# Altium PCB PCB1.PcbDoc
Units mil, origin at the board's own origin, x right, y up, seen from the top; angles counter-clockwise.
Board outline 1294.43 x 885.83 mil, 4 copper layers (Top Layer, GND, Sign, Bottom Layer), stack 68.548 mil thick; 63 components, 56 nets, 292 pads, 222 vias.
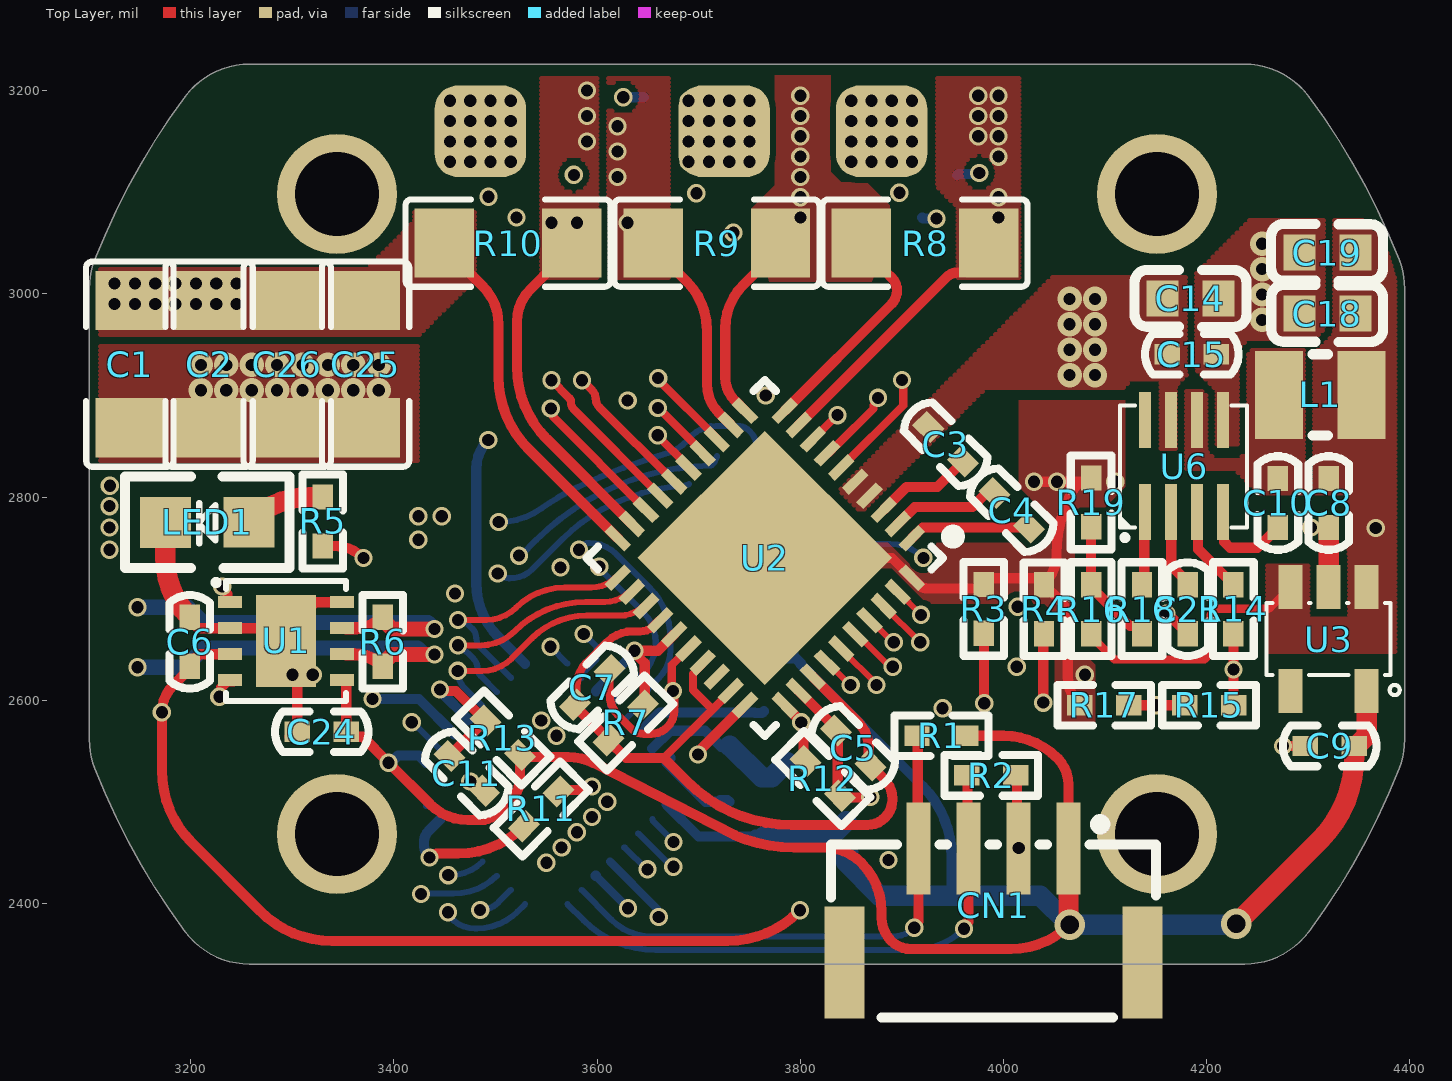
[diagram p0: Top Layer view]
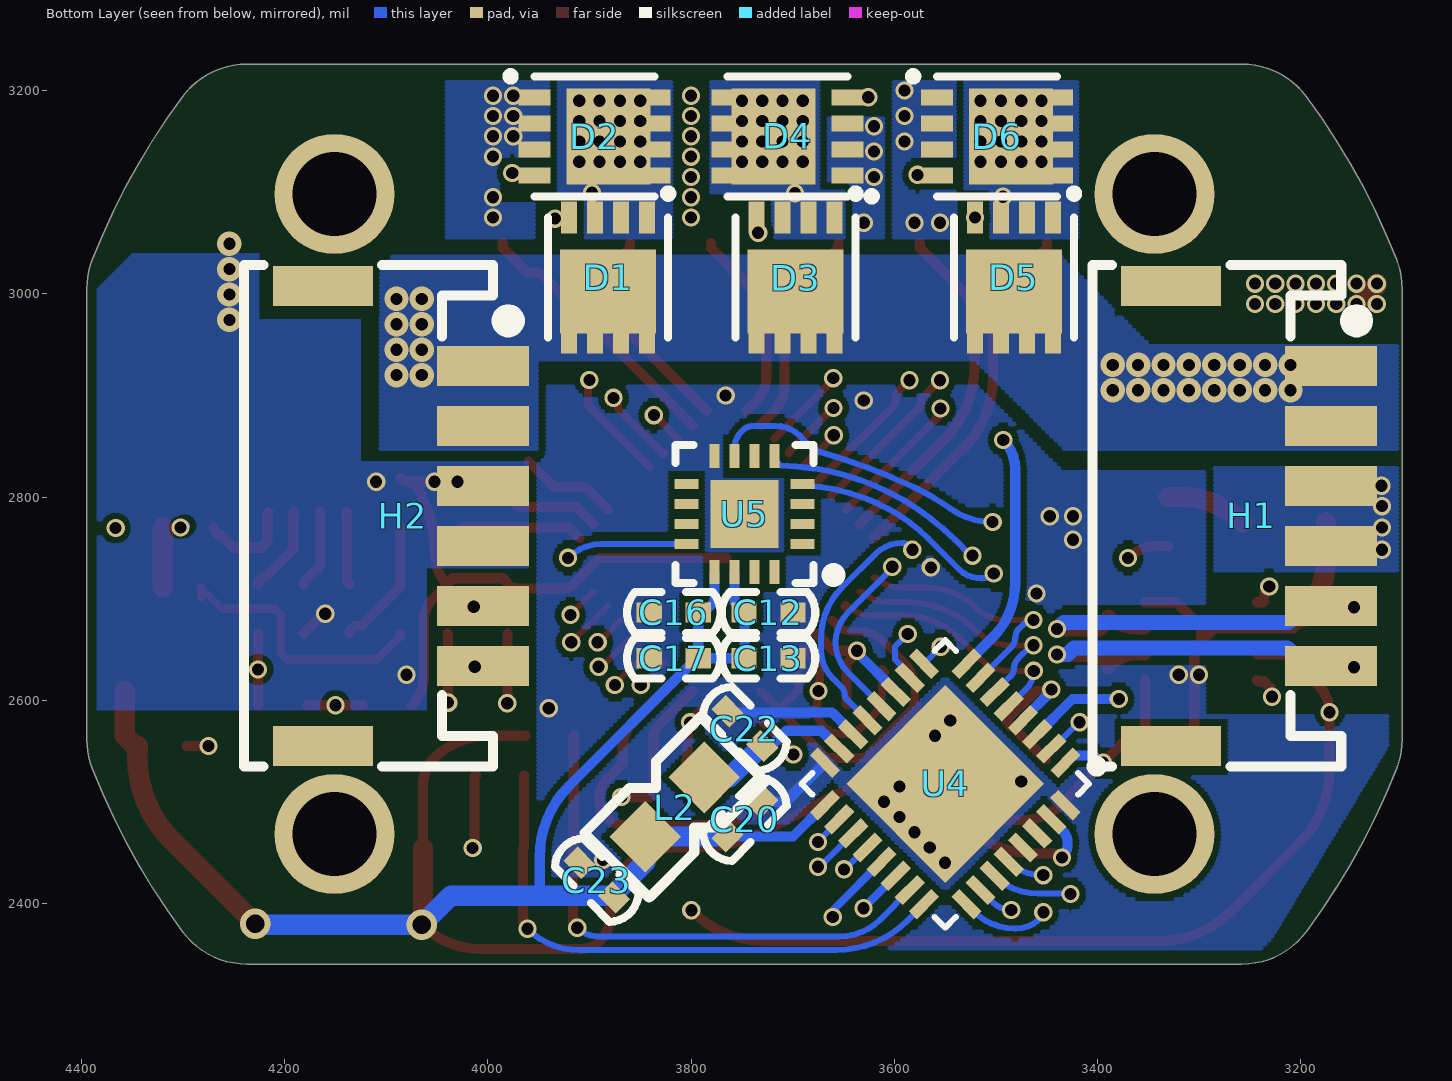
[diagram p1: Bottom Layer view, seen from below]
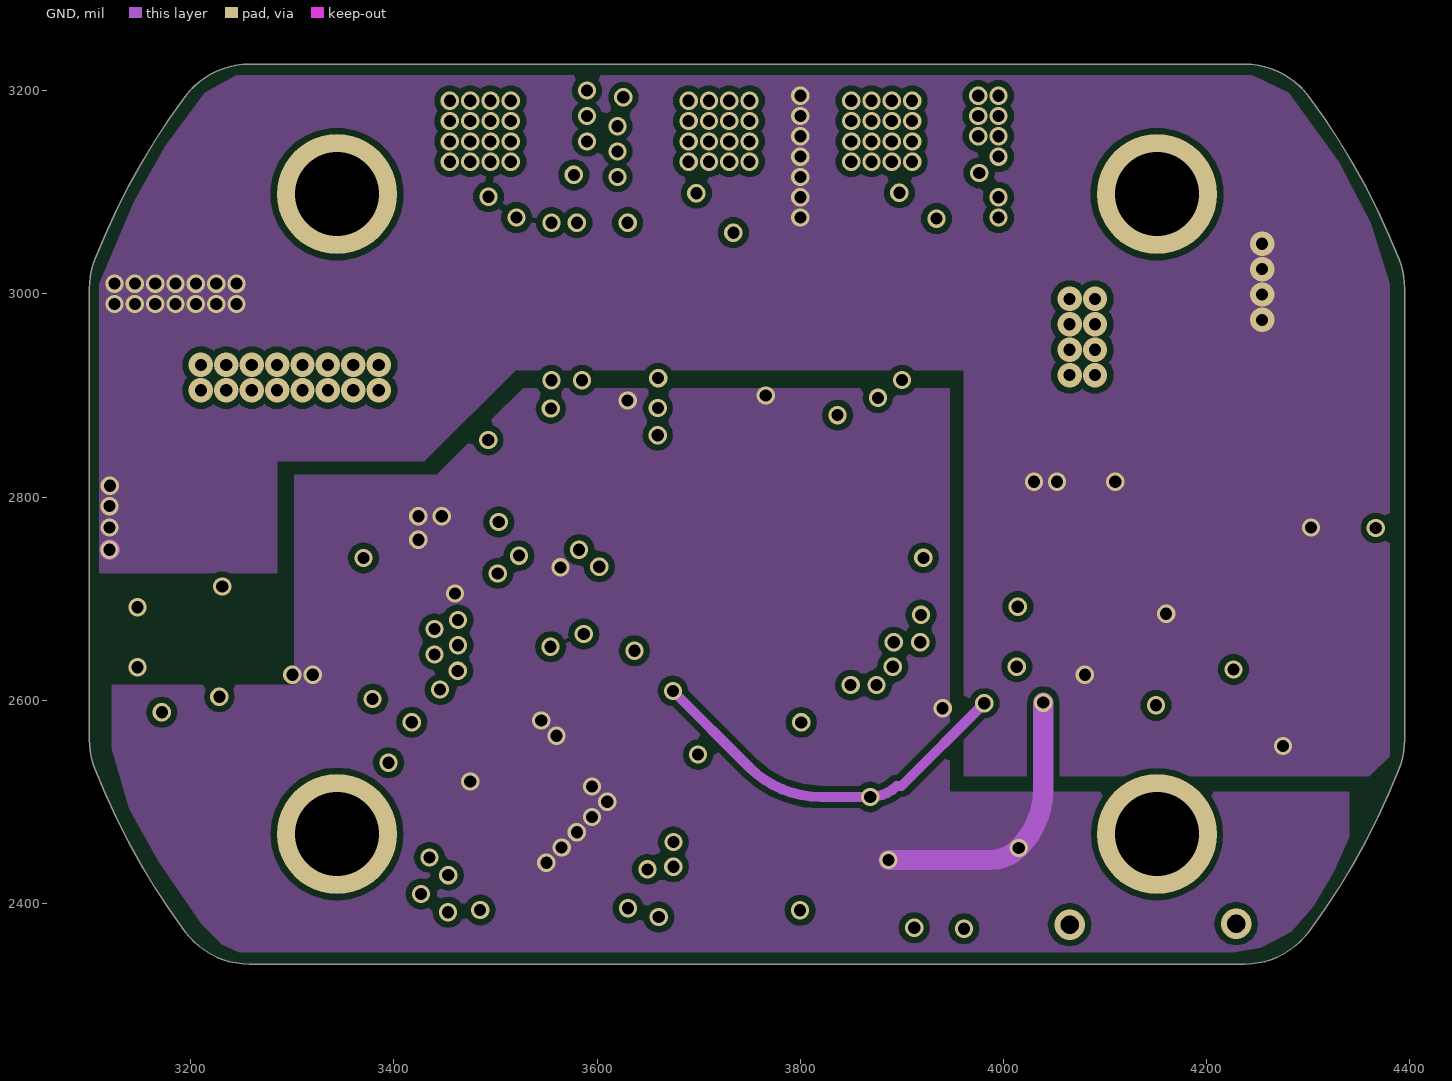
[diagram p2: GND]
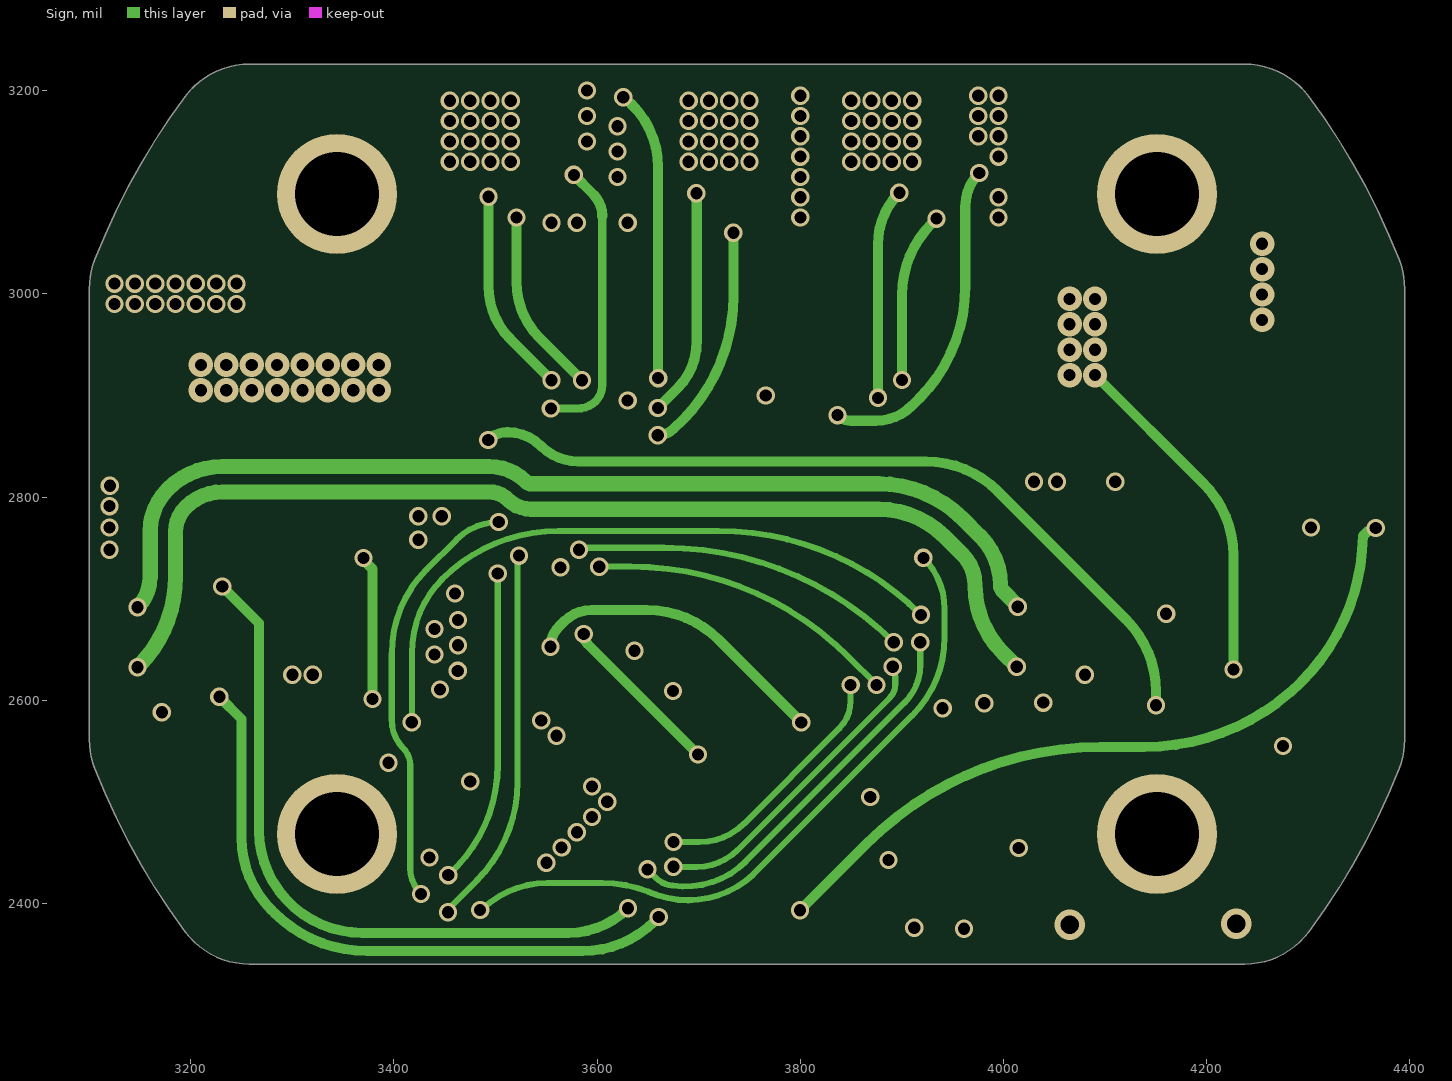
[diagram p3: Sign]
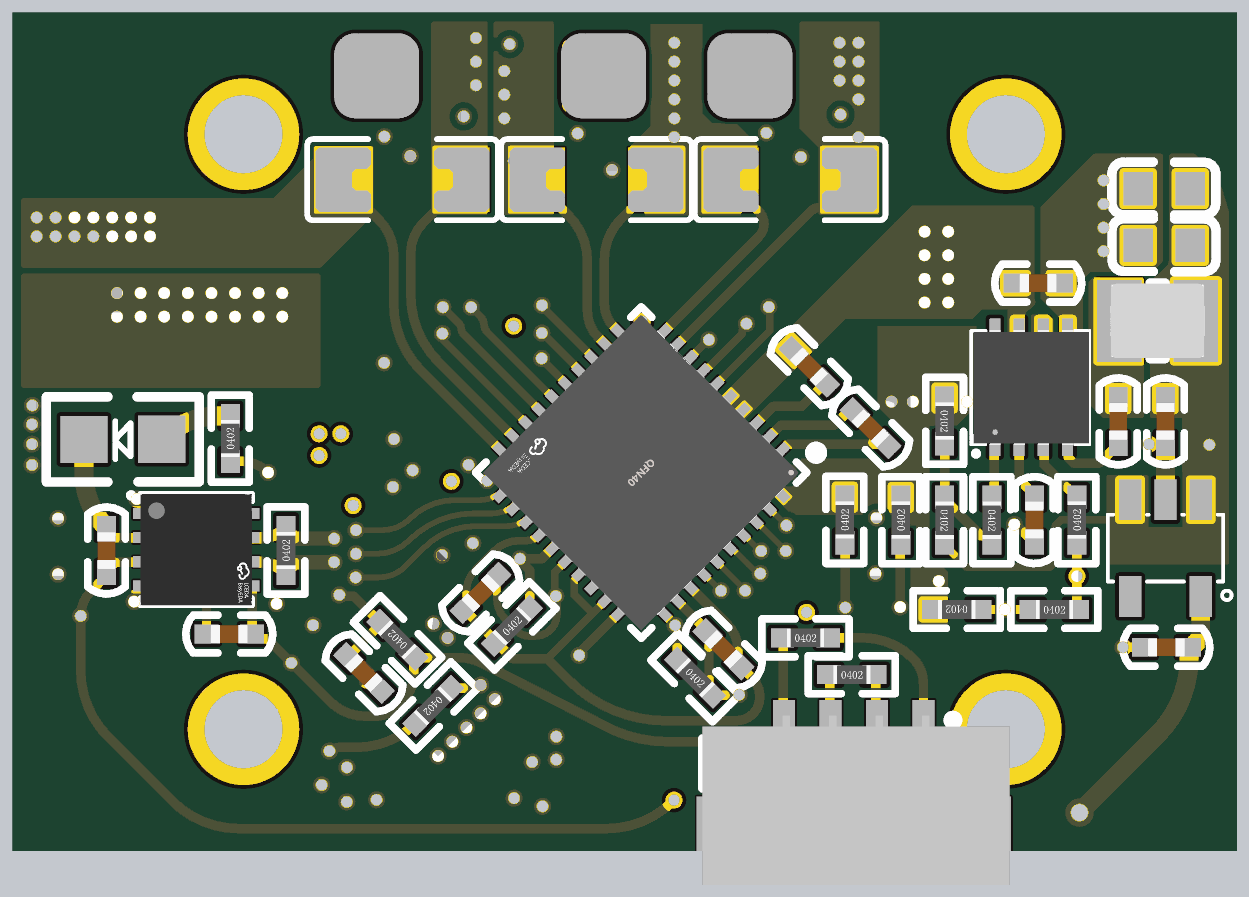
[diagram p4: 3D render of the assembled board from above, using the file's embedded part models]
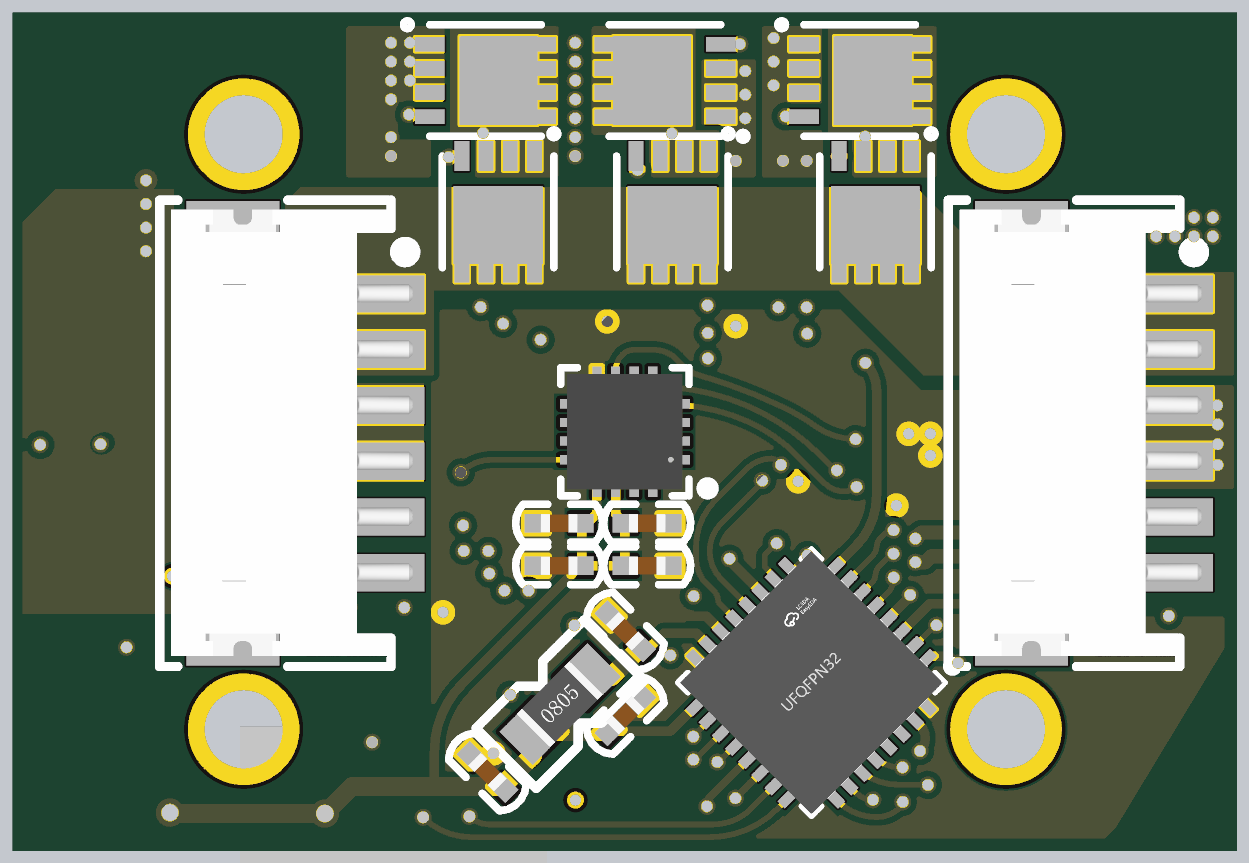
[diagram p5: 3D render of the assembled board from below, using the file's embedded part models]

## Layer stack, top to bottom
Top Solder: solder mask 0.4, Solder Resist, Dk 3.5
Top Layer: signal copper 1.4
Dielectric 2: prepreg 7.874, PP-006, Dk 4.1
GND: signal copper 1.378
Dielectric 1: dielectric 47.2441, FR-4, Dk 4.8
Sign: signal copper 1.378
Dielectric 3: prepreg 7.874, PP-006, Dk 4.1
Bottom Layer: signal copper 1.4
Bottom Solder: solder mask 0.4, Solder Resist, Dk 3.5

## Board outline
3194.62,2372 cw(c3747.47,2783.17) 3105.64,2532.67 cw(c3178.99,2561.3) 3100.25,2561.3 3100.25,3005.03 cw(c3178.99,3005.03) 3105.64,3033.66 cw(c3747.46,2783.17) 3194.62,3194.33 cw(c3257.81,3147.34) 3257.81,3226.08 4237.13,3226.08 cw(c4237.13,3147.34) 4300.31,3194.33 cw(c3747.47,2783.17) 4389.29,3033.66 cw(c4315.94,3005.03) 4394.68,3005.03 4394.68,2561.3 cw(c4315.94,2561.3) 4389.29,2532.67 cw(c3747.47,2783.16) 4300.31,2372 cw(c4237.13,2418.99) 4237.13,2340.25 3257.81,2340.25 cw(c3257.81,2418.99)

## Design rules (kind name [scope] priority, off if disabled: settings)
Clearance [All] p1: gap=6 ignorepadtopadclearanceinfootprint=FALSE except(0: Arc-Hole Track-Hole SMDPad-Hole THPad-Hole Via-Hole Fill-Hole Poly-Hole Region-Hole Text-Hole)
DiffPairsRouting [All] p1: maxlimit=10 minlimit=10 mostfreqgap=10 toplayer_minwidth=12 toplayer_maxwidth=15 toplayer_prefwidth=15 midlayer1_minwidth=15 midlayer1_maxwidth=15 midlayer1_prefwidth=15 midlayer2_minwidth=15 midlayer2_maxwidth=15 midlayer2_prefwidth=15 bottomlayer_minwidth=15 bottomlayer_maxwidth=15 bottomlayer_prefwidth=15 maxuncoupledlength=500
HoleToHoleClearance [All] p1: gap=0 allowstackedmicrovias=TRUE
MinimumSolderMaskSliver [All] p1: minsoldermaskwidth=0
PlaneClearance [All] p1: clearance=6
PlaneConnect [All] p1: planeconnectstyle=Direct reliefexpansion=20 reliefentries=4 reliefconductorwidth=10 reliefairgap=10
PolygonConnect [All] p1: connectstyle=Direct reliefconductorwidth=10 reliefentries=4 polygonreliefangle="90 Angle" airgapwidth=10
RoutingVias [All] p1: holewidth=12 width=18 viastyle="Through Hole" minholewidth=12 minwidth=18 maxholewidth=28 maxwidth=50
SilkToSilkClearance [All] p1: silktosilkclearance=0
SilkToSolderMaskClearance [IsPad] p1: minsilkscreentomaskgap=0 clearancetoexposedcopper=TRUE
SolderMaskExpansion [All] p1: expansion=4 istentingtop=FALSE
Width [All] p1: maxlimit=20 minlimit=6 preferedwidth=10
23 further rules are at their usual default settings.

## Classes and differential pairs
differential pair CAN: +CAN_P -CAN_N

## Components (designator, comment, footprint, x,y, rotation, side; value= is the part's Value field where it differs from the comment)
C1 "100uF" 1206 3156.98,3521.63 r270 top
C2 "100uF" 1206 3234.98,3521.63 r270 top
C3 "1uF" c0402 3960,2835 r135 top
C4 "47nF" c0402 4025,2770 r135 top
C5 "1uF" c0402 3835,2570 r315 top
C6 "0.1uF" c0402 3198.93,2681.57 r270 top
C7 "0.1uF" c0402 3612.1,2629.59 r225 top
C8 "10uF" c0402 4320,2770 r90 top
C9 "10uF" c0402 4296.8,2555 r0 top
C10 "100nF" c0402 4270,2770 r90 top
C11 "0.1uF" c0402 3488.58,2510.84 r135 top
C12 "1uF" C0402 3747.93,2686.33 r180 bottom
C13 "100nF" C0402 3747.93,2641.33 r180 bottom
C14 "10uF" C0603 4799.08,3083.51 r180 top
C15 "100nF" c0402 4209.38,2940.55 r180 top
C16 "1uF" C0402 3841.13,2686.33 r180 bottom
C17 "100nF" C0402 3841.13,2641.33 r180 bottom
C18 "10uF" C0603 3703.41,2892.6 r0 top
C19 "10uF" C0603 3703.29,2952.6 r0 top
C20 "0.1uF" c0402 3764.08,2465.92 r135 bottom
C21 "100nF" c0402 4181.18,2665.55 r90 top
C22 "0.1uF" c0402 3764.08,2589.08 r225 bottom
C23 "0.1uF" c0402 3910,2440 r225 bottom
C24 "0.1uF" c0402 3353,2569 r180 top
C25 "100uF" 1206 3388.98,3521.63 r270 top
C26 "100uF" 1206 3311.98,3521.63 r270 top
CN1 "卧式STLINK" CONN-SMD_4P-P1.25_GH1.25-4P 3990,2398 r0 top
D1 "NTMFS5C410NL" DFN-8_L3.0-W3.0-P0.65-BL 3881.61,3015.94 r0 bottom
D2 "NTMFS5C410NL" DFN-8_L3.0-W3.0-P0.65-BL 3895,3155 r270 bottom
D3 "NTMFS5C410NL" DFN-8_L3.0-W3.0-P0.65-BL 3697.2,3015.94 r0 bottom
D4 "NTMFS5C410NL" DFN-8_L3.0-W3.0-P0.65-BL 3705,3155 r90 bottom
D5 "NTMFS5C410NL" DFN-8_L3.0-W3.0-P0.65-BL 3482.2,3015.94 r0 bottom
D6 "NTMFS5C410NL" DFN-8_L3.0-W3.0-P0.65-BL 3498.78,3155 r270 bottom
H1 "卧式GH1.25 6PIN" CONN-SMD_6P-P1.50_ZX-ZH1.5-6PWT 3265,2782 r270 bottom
H2 "卧式GH1.25 6PIN" CONN-SMD_6P-P1.50_ZX-ZH1.5-6PWT 4100,2782 r270 bottom
L1 "22uH" IND-SMD_L2.5-W2.0 4311.66,2900.55 r180 top value=10uH
L2 "10μH" L0805 3845,2465.61 r135 bottom
LED1 "LED" led0805 3257.3,2775.2 r180 top
R1 "10KΩ" R0402 3914.8,2565 r0 top
R2 "10KΩ" R0402 3963.8,2526 r0 top
R3 "0Ω" R0402 3980.53,2665.71 r90 top
R4 "0Ω" R0402 4039.81,2665.48 r90 top
R5 "2KΩ" R0402 3330,2751.8 r90 top
R6 "120Ω" R0402 3388.93,2633.37 r90 top
R7 "10KΩ" R0402 3611.05,2560.62 r45 top
R8 "30mR" 1206 3331.77,3066.98 r0 top
R9 "30mR" 1206 4308.63,3033.02 r180 top
R10 "30mR" 1206 2921.37,3066.98 r0 top
R11 "10KΩ" R0402 3562,2510 r225 top
R12 "200KΩ" R0402 3805,2540 r315 top
R13 "10KΩ" R0402 3524.08,2545.92 r135 top
R14 "10KΩ" R0402 4226.18,2665.55 r90 top
R15 "10KΩ" R0402 4178.2,2595 r0 top
R16 "43KΩ" R0402 4086.18,2713.75 r270 top
R17 "1KΩ" R0402 4123.2,2595 r180 top
R18 "51KΩ" R0402 4136.18,2713.75 r270 top
R19 "8.2KΩ" R0402 4086.18,2818.75 r270 top
U1 "SIT1057QTK/3" DFN-8_L3.0-W3.0-P0.65-BL-EP 3293.93,2658.37 r270 top
U2 "DRV8323HRTAR" QFN-40_L6.0-W6.0-P0.50-BL-EP4.5 3765,2740 r135 top
U3 "XC6201P332MR-HXY" SOT-23-5_L3.0-W1.7-P0.95-LS2.8-BR 4320,2660 r90 top
U4 "STM32G431KBU3" UFQFPN-32_L5.0-W5.0-P0.50-BL-EP3.5 3549.88,2517.62 r45 bottom
U5 "MA600" qfn-16-l3.0-w3.0-p0.50-tl-ep1.7 3747.47,2783.16 r0 bottom locked
U6 "MP9943" "QFN-8 3x3" 4139.41,2785 r90 top

## Footprints (in the part's own frame and the unit in brackets; to place one, negate y for a bottom-side part, rotate by r counter-clockwise, add the part's x,y. Pads: shape width x height; smd on the part's side, far side on the other; paste and mask are expansions set on the pad)
1206 [mm]
  rect 1.485x1.728 smd paste-100 mask+0.051: 1(13.417,-0.431) 2(16.602,-0.431)
  silkscreen extent 12.45,-1.52 17.57,0.66, body extent 13.41,-1.24 16.61,0.38, height 1.11
c0402 [mil]
  rect 25x20 smd: 1(0,0) 2(48.2,0)
  silkscreen extent -22,-20 70,20, body extent 5,-10 44,10, height 20
C0402 [mil]
  rect 25x20 smd: 1(0,0) 2(48.2,0)
  silkscreen extent -22,-20 70,20, body extent 5,-10 44,10, height 20
C0603 [mm]
  rect 0.8x0.9 smd: 1(14.929,2.234) 2(16.33,2.234)
  silkscreen extent 14.22,1.52 17.02,2.95, body extent 14.82,1.84 16.42,2.64, height 0.78
CONN-SMD_4P-P1.25_GH1.25-4P [mm]
  rect 0.6x2.3 smd mask+0.051: 1(1.875,1.425) 2(0.625,1.425) 3(-0.625,1.425) 4(-1.875,1.425)
  rect 1x2.8 smd mask+0.051: 5(-3.725,-1.425) 6(3.725,-1.425)
  silkscreen extent -4.06,-2.8 4.06,2.16, body extent -4.07,-2.4 4.19,2.15, height 4.13
CONN-SMD_6P-P1.50_ZX-ZH1.5-6PWT [mm]
  rect 1x2.3 smd paste+0 mask+0.05: 1(-3.738,2.413) 2(-2.238,2.413) 3(-0.738,2.413) 4(0.762,2.413) 5(2.262,2.413) 6(3.762,2.413)
  rect 1x2.5 smd paste+0 mask+0.05: 7(5.762,-1.587) 8(-5.738,-1.587)
  silkscreen extent -6.26,-3.56 6.28,3.46, body extent -6,-3.25 6.01,3.25, height 3.78
DFN-8_L3.0-W3.0-P0.65-BL [mm]
  rect 0.4x0.8 smd paste-100 mask+0.051: D(-0.975,1.5) D(-0.325,1.5) D(0.325,1.5) D(0.975,1.5) G(0.975,-1.5) S(-0.975,-1.5) S(-0.325,-1.5) S(0.325,-1.5)
  rect 2.4x2.1 smd paste-100 mask+0.051: D(0,0.35)
  silkscreen extent -1.6,-2.2 1.5,1.5, body extent -1.55,-1.6 1.55,1.6, height 0.8
DFN-8_L3.0-W3.0-P0.65-BL-EP [mm]
  rect 0.3x0.6 smd paste+0 mask+0.05: 1(-0.975,-1.4) 2(-0.325,-1.4) 3(0.325,-1.4) 4(0.975,-1.4) 5(0.975,1.4) 6(0.325,1.4) 7(-0.325,1.4) 8(-0.975,1.4)
  rect 2.3x1.5 smd paste+0 mask+0.05: 9(0,0)
  silkscreen extent -1.51,-1.8 1.5,1.5, body extent -1.5,-1.5 1.5,1.5, height 1.01
IND-SMD_L2.5-W2.0 [mm]
  rect 1.2x2.2 smd: 1(1.028,0) 2(-1.028,0)
  silkscreen extent -0.2,-1.02 0.2,1.02, body extent -1.26,-1 1.26,1, height 1.2
L0805 [mil]
  rect 50x50 smd: 1(0,0) 2(82.3,0.2)
  silkscreen extent -40,-45 122,45, body extent 1,-24 80,25, height 22
led0805 [mil] "1/8W"
  rect 50x50 smd: 1(0,0) 2(82.3,0.2)
  silkscreen extent -40,-45 122,45, body extent 2,-25 80,25, height 20
"QFN-8 3x3" [mm]
  rect 1.4x0.3 smd: 1(0,0) 2(0,-0.65) 3(0,-1.3) 4(0,-1.95) 5(2.3,-1.95) 6(2.3,-1.3) 7(2.3,-0.65) 8(2.3,0)
  silkscreen extent -0.64,-2.54 2.67,0.64, body extent -0.41,-2.53 2.69,0.57, height 0.94
qfn-16-l3.0-w3.0-p0.50-tl-ep1.7 [mm]
  rect 0.6x0.25 smd: 1(-1.45,0.75) 2(-1.45,0.25) 3(-1.45,-0.25) 4(-1.45,-0.75) 9(1.45,-0.75) 10(1.45,-0.25) 11(1.45,0.25) 12(1.45,0.75)
  rect 0.25x0.6 smd: 5(-0.75,-1.45) 6(-0.25,-1.45) 7(0.25,-1.45) 8(0.75,-1.45) 13(0.75,1.45) 14(0.25,1.45) 15(-0.25,1.45) 16(-0.75,1.45)
  rect 1.7x1.7 smd: 17(0,0)
  silkscreen extent -2.38,-1.72 1.72,1.72, body extent -1.55,-1.55 1.55,1.55, height 0.94
QFN-40_L6.0-W6.0-P0.50-BL-EP4.5 [mm]
  rect 0.25x0.7 smd paste-100 mask+0.051: 1(-2.25,-2.95) 2(-1.75,-2.95) 3(-1.25,-2.95) 4(-0.75,-2.95) 5(-0.25,-2.95) 6(0.25,-2.95) 7(0.75,-2.95) 8(1.25,-2.95) 9(1.75,-2.95) 10(2.25,-2.95) 21(2.25,2.95) 22(1.75,2.95) 23(1.25,2.95) 24(0.75,2.95) 25(0.25,2.95) 26(-0.25,2.95) 27(-0.75,2.95) 28(-1.25,2.95) 29(-1.75,2.95) 30(-2.25,2.95)
  rect 0.7x0.25 smd paste-100 mask+0.051: 11(2.95,-2.25) 12(2.95,-1.75) 13(2.95,-1.25) 14(2.95,-0.75) 15(2.95,-0.25) 16(2.95,0.25) 17(2.95,0.75) 18(2.95,1.25) 19(2.95,1.75) 20(2.95,2.25) 31(-2.95,2.25) 32(-2.95,1.75) 33(-2.95,1.25) 34(-2.95,0.75) 35(-2.95,0.25) 36(-2.95,-0.25) 37(-2.95,-0.75) 38(-2.95,-1.25) 39(-2.95,-1.75) 40(-2.95,-2.25)
  rect 4.5x4.5 smd paste-100 mask+0.051: 41(0,0)
  silkscreen extent -3.15,-3.85 3.15,3.15, body extent -3.01,-3.01 3.01,3.01, height 0.83
R0402 [mil] "1/16W"
  rect 25x20 smd: 1(0,0) 2(48.2,0)
  silkscreen extent -22,-20 70,20, body extent 5,-10 44,10, height 14
SOT-23-5_L3.0-W1.7-P0.95-LS2.8-BR [mm]
  rect 1.1x0.6 smd: 1(1.3,-0.95) 2(1.3,0) 3(1.3,0.95) 4(-1.3,0.95) 5(-1.3,-0.95)
  silkscreen extent -1.4,-1.78 0.9,1.55, body extent -1.5,-1.5 1.5,1.5, height 1.3
UFQFPN-32_L5.0-W5.0-P0.50-BL-EP3.5 [mm]
  rect 0.28x0.8 smd paste-100 mask+0.051: 1(-1.75,-2.5) 2(-1.25,-2.5) 3(-0.75,-2.5) 4(-0.25,-2.5) 5(0.25,-2.5) 6(0.75,-2.5) 7(1.25,-2.5) 8(1.75,-2.5) 17(1.75,2.5) 18(1.25,2.5) 19(0.75,2.5) 20(0.25,2.5) 21(-0.25,2.5) 22(-0.75,2.5) 23(-1.25,2.5) 24(-1.75,2.5)
  rect 0.8x0.28 smd paste-100 mask+0.051: 9(2.5,-1.75) 10(2.5,-1.25) 11(2.5,-0.75) 12(2.5,-0.25) 13(2.5,0.25) 14(2.5,0.75) 15(2.5,1.25) 16(2.5,1.75) 25(-2.5,1.75) 26(-2.5,1.25) 27(-2.5,0.75) 28(-2.5,0.25) 29(-2.5,-0.25) 30(-2.5,-0.75) 31(-2.5,-1.25) 32(-2.5,-1.75)
  rect 3.5x3.5 smd paste-100 mask+0.051: 33(0,0)
  silkscreen extent -2.54,-3.12 2.54,2.54, body extent -2.51,-2.52 2.52,2.51, height 0.61

## Part data
C1 C2 C14 C18 C19 C25 C26: library part 1210贴片电容, "1210贴片电容"
C3 C4 C5 C6 C7 C8 C9 C10 C11 C12 C13 C15 C16 C17 C20 C21 C22 C23 C24: library part 0402贴片电容, "贴片电容0402"
D1 D2 D3 D4 D5 D6: "N沟道MOS管", ComponentLink1Description="Manufacturer Link", ComponentLink1URL=http://www.irf.com/, DatasheetVersion=PD-9.814, LatestRevisionDate=17-Jul-2002, LatestRevisionNote="Re-released for DXP Platform.", Note="Pin 2 is electrically connected to pin 4.", PackageDescription="TO, Thru-Hole, Vertical, Heatsink Mounted; 3 In-Line Leads; Pitch 2.54 mm", PackageReference=TO-220AB, PackageVersion=Feb-1997, Published=8-Jun-2000, Publisher="Altium Limited"
L1: library part 0530屏蔽电感, "一体成型屏蔽电感，0530封装，额定电流3A", DC Resistance (DCR)=125mΩ, JLCPCB Part Class="Extended Part", LCSC Part Name="10uH ±20% 3.5A", Manufacturer=XR(祥如), Manufacturer Part=XR0530-100M, Rated Current=3.2A, Saturation Current (Isat)=3.5A, Tolerance=±20%, Add into BOM=yes, Convert to PCB=yes, Datasheet=https://atta.szlcsc.com/upload/public/pdf/source/20240328/42FE63A3232C4AF7EB8F1CDEDD5FC69F.pdf, Device=XR0530-100M, Supplier=LCSC, Supplier Footprint=SMD,0530, Supplier Part=C5307602, Symbol=XR0530-100M, Type=一体成型电感
L2: library part 0805贴片电感, "0805贴片电感"
LED1: library part 0805贴片LED, "0805贴片LED"
R1 R2 R3 R4 R5 R6 R7 R11 R12 R13 R14 R15 R16 R17 R18 R19: library part 0402贴片电阻, "0402贴片电阻"
R8 R9 R10: library part 2512检流电阻, "2512检流电阻"
U2: JLCPCB Part Class="Extended Part", LCSC Part Name="5mA 无刷直流BLDC电机驱动芯片 60V", Manufacturer=TI(德州仪器), Add into BOM=yes, Convert to PCB=yes, Datasheet=https://www.ti.com/cn/lit/gpn/drv8323, Device=DRV8323HRTAR, Manufacturer Part=DRV8323HRTAR, Supplier=LCSC, Supplier Footprint=QFN-40-EP(6x6), Supplier Part=C701783, Symbol=DRV8323HRTAR
U3: "3.3V LDO", JLCPCB Part Class="Extended Part", Manufacturer="HXY MOSFET(华轩阳电子)", MAX Output Current=300mA, Maximum Input Voltage=12V, Output Voltage=3.3V, Add into BOM=yes, Convert to PCB=yes, Datasheet=https://atta.szlcsc.com/upload/public/pdf/source/20231208/3D7EFECB06481ED5AED4680614D7FFF5.pdf, Device=XC6201P332MR-HXY, LCSC Part Name=XC6201P332MR-HXY, Manufacturer Part=XC6201P332MR-HXY, Output Polarity=正极, Output Type=固定, Supplier=LCSC, Supplier Footprint=SOT-23-5L, Supplier Part=C19626990, Symbol=XC6201P332MR-HXY
U4: JLCPCB Part Class="Extended Part", LCSC Part Name="带DSP和FPU的170MHz主流ARM Cortex-M4 MCU，具有128 KB Flash存储器、数学加速器和中等模拟电平集成", Low Voltage Detection Threshold=1.71V~3.6V, Manufacturer=ST(意法半导体), ADC (Bit)=12bit, Add into BOM=yes, Application Area=-, Convert to PCB=yes, CPU Core=ARM-M4, CPU Maximum Speed=170MHz, DAC (Bit)=12bit, Datasheet=https://atta.szlcsc.com/upload/public/pdf/source/20210607/F3CD0646E5D00AAFDE875C196C2D7333.pdf, Device=STM32G431KBU3, Manufacturer Part=STM32G431KBU3, Number of I/O=26, Program Memory Type=FLASH, Program Storage Size=128KB, Supplier=LCSC, Supplier Footprint=UFQFPN-32(5x5), Supplier Part=C1341901, Symbol=STM32G431KBU3
U5: "磁编码器"

## Free pads (board coordinates)
  round 118.11 hole 82.68: 5(3343.92,3098.12) 6(3343.92,2468.2) 7(4151.01,2468.2) 8(4151.01,3098.12)
  rrect50% 90x90 smd: 9(3485,3160) 9(3725,3160) 9(3880,3160)

## Via types
v1: diameter 18, hole 12, Top Layer to Bottom Layer, tented both sides, 181 vias
v2: diameter 24, hole 12, Top Layer to Bottom Layer, tented both sides, 28 vias
v3: diameter 18, hole 12, Top Layer to Bottom Layer, 11 vias
v4: diameter 30, hole 18, Top Layer to Bottom Layer, tented both sides, 2 vias

## Nets (pads, with @x,y where several pads share a name; then routed paths per layer and width w, separated by ;. In a path a pad name is that pad's centre, name@x,y a point inside that pad or via, vN(x,y) a via of type N, cw(c..) or ccw(c..) an arc to the next point about the centre after c; other vN are vias at no path point)
3V3: C9.2 C12.1 C13.1 C16.2 C17.2 C20.1 C23.2 C24.1 CN1.1 L2.1 R1.2 R13.1 U1.5 U3.5 U4.1 U4.17 U5.13 U5.14 | length 2648.1
  Top Layer w10: U1.5@3353.12,2619.61 3353,2619.5 C24.1 3358,2564 3369.11,2564 v1(3394.65,2538.46) 3435.59,2497.52 ccw(c3473.05,2534.98) 3473.05,2482 3485.1,2482 ccw(c3485.1,2505.9) 3502,2489 3515.52,2502.52 ; 3515.53,2502.53 ccw(c3494.84,2523.2) 3524.08,2523.2 3524.08,2535.31 3525.85,2537.08 R13.1@3525.85,2544.15 ; R13.1 R13.1@3525.85,2544.15 ; R1.2 3999.89,2565 cw(c3999.89,2489.89) 4053,2543 cw(c4026.88,2516.88) 4063.82,2516.88 CN1.1 ; v4(4065,2379) cw(c4007.06,2436.94) 4007.06,2355 3909.14,2355 cw(c3909.14,2383.03) 3889.36,2363.17 cw(c3911.84,2385.72) 3880,2385.78 3880,2391.72 ccw(c3811.72,2391.72) 3860,2440 ccw(c3823.79,2403.79) 3823.79,2455 3793.63,2455 cw(c3793.53,2599.45) 3735.4,2467.21 cw(c3793.53,2599.45) 3735.13,2467.33 ccw(c3730.53,2458.45) 3735.05,2467.37 3596.69,2538.03 ccw(c3571.25,2488.21) 3571.25,2544.15 R13.1@3525.85,2544.15
  Top Layer w20: CN1.1 4063.82,2380.18 v4(4065,2379) ; v4(4229,2380) 4311.22,2462.22 ccw(c4229.51,2543.94) C9.2@4344.54,2554.96 ; C9.2@4347.5,2555 4357.4,2564.9 U3.5
  Bottom Layer w10: v1(3394.65,2538.46) 3396.81,2538.46 3404.08,2545.73 3424.32,2545.73 U4.1 ; U4.17@3668.4,2497.25 3699.73,2465.92 3753.48,2465.92 3755.24,2467.69 3762.31,2467.69 C20.1 ; C13.1@3747.43,2641.83 3747.43,2686.33 3757.31,2696.2 U5.14 ; C13.1 C17.2 C16.2 ; U5.13 3777,2696.76 3787.43,2686.33 C16.2@3789.93,2686.33 ; C17.2@3794.75,2641.33 3795.43,2641.33 3800.43,2636.33 3800.43,2635.37 3919.71,2516.09 cw(c3849,2445.38) 3949,2445.38 3949,2407.69
  Bottom Layer w20: C20.1 3765.85,2464.15 3767.62,2465.92 3823.48,2465.92 3823.79,2465.61 3829.76,2465.61 L2.1@3845,2480.86 ; L2.1@3847.19,2449.74 3845,2447.55 3845,2440.37 3877.69,2407.69 3949,2407.69 4036.31,2407.69 v4(4065,2379) 4228,2379 v4(4229,2380)
5V: C6.2 C8.2 C18.2 C19.2 L1.2 R16.2 U1.3 U3.1 U3.3 | length 1894
  Top Layer w6: U3.3@4282,2700 4282.6,2700.6 U3.3
  Top Layer w8: R16.2@4086.18,2663.05 4109.23,2640 4197.64,2640 4203.49,2645.86 4203.49,2684.14 4209.35,2690 4260,2690 ccw(c4260,2693.42) 4262.41,2691 U3.3
  Top Layer w10: U1.3@3242.88,2645.2 3208.27,2645.2 3198.93,2635.87 C6.2 3198.93,2630.87 3182.38,2614.32 ccw(c3208.46,2588.24) v1(3171.58,2588.24) 3171.58,2530.6 ccw(c3271.58,2530.6) 3200.86,2459.89 3268.46,2392.29 ccw(c3339.17,2463) 3339.17,2363 3728.1,2363 ccw(c3728.1,2463) 3798.75,2392.23 ccw(c3728.1,2463) 3798.81,2392.29 v3(3799.71,2393.19) ; R16.2@4086.18,2663.05 R16.2
  Sign w10: v3(3799.71,2393.19) 3865.13,2458.61 cw(c4095.37,2228.45) 4095.37,2554 4138.21,2554 ccw(c4138.26,2773.07) 4293.16,2618.16 ccw(c4147.25,2764.11) 4353.61,2761.62 4356.45,2764.45 4357.86,2765.86 4359.69,2766.62 v1(4366.4,2769.4)
AGND: C5.1 C7.1 R3.1 R12.2 U2.26 U2.32 | length 798.1
  Top Layer w8: C7.1@3610.33,2627.82 3610.33,2620.75 3612.1,2618.98 3612.1,2606.33 ccw(c3642.64,2606.33) 3621.04,2584.74 3633.87,2571.91 ; 3633.88,2571.9 ccw(c3645.94,2583.97) 3645.94,2566.91 3653,2566.91 ccw(c3653,2589.74) 3669.14,2573.59 ccw(c3653,2589.74) 3675.83,2589.74 3675.83,2607.87 v1(3674.57,2609.12) 3673.38,2610.32 3673.38,2634.47 U2.26
  Top Layer w10: C7.1@3610.33,2627.82 C7.1 ; U2.32 3798.41,2609.04 3835,2572.45 C5.1 3836.77,2568.23 3836.77,2515.3 3839.08,2512.99 R12.2 3840.85,2504.15 3868.13,2504.15 v1(3868.73,2504.75) ; R3.1 3980.76,2665.48 3980.76,2597.24 v1(3981,2597)
  GND w10: v1(3674.57,2609.12) 3749.66,2534.04 ccw(c3820.37,2604.75) 3820.37,2504.75 v1(3868.73,2504.75) ccw(c3868.73,2541.79) 3894.91,2515.59 3899.59,2515.59 v1(3981,2597)
  Sign w10: v1(3674.57,2609.12) v1@3676.11,2607.59 ; v1(3868.73,2504.75) v1@3868.73,2506.92
CAN_N: H1.6 H2.6 R6.1 U1.6 | length 1483.6
  Top Layer w12: U1.6@3353.12,2645.2 3360.36,2645.2 cw(c3360.36,2604.8) R6.1
  Top Layer w15: R6.1 3388.93,2635.87 3398.03,2644.97 3423,2644.97 3423.08,2645.05 v1(3439.86,2645.05)
  Sign w15: v1(3147.64,2632.36) 3148.39,2633.11 ccw(c3060,2721.5) 3185,2721.5 3185,2765.86 cw(c3219.14,2765.86) 3195,2790 cw(c3231.21,2753.79) 3231.21,2805 3493.79,2805 cw(c3493.79,2778.79) 3512.32,2797.32 ccw(c3534.83,2819.83) 3534.83,2788 3876.82,2788 cw(c3876.82,2695.82) 3942,2761 3959.27,2743.73 cw(c3928.54,2713) 3972,2713 ccw(c4066.15,2713) 3999.58,2646.42 v1(4013,2633)
  Bottom Layer w15: v1(3147.64,2632.36) 3194.06,2632.36 3213.12,2651.42 3423.13,2651.42 3429.5,2645.05 v1(3439.86,2645.05)
CAN_P: H1.5 H2.5 R6.2 U1.7 | length 1429.9
  Top Layer w12: U1.7@3353.12,2670.8 3362.92,2670.8 ccw(c3362.92,2707.59) R6.2
  Top Layer w15: R6.2 3388.93,2679.07 3398.03,2669.97 3412.65,2669.97 3412.72,2670.05 v1(3439.86,2670.05)
  Sign w15: v1(3147.64,2691.42) ccw(c3117.79,2721.26) 3160,2721.26 3160,2765.86 cw(c3219.14,2765.86) 3177.32,2807.68 cw(c3231.21,2753.79) 3231.21,2830 3493.79,2830 cw(c3493.79,2778.79) 3530,2815 ccw(c3534.83,2819.83) 3534.83,2813 3876.82,2813 cw(c3876.82,2695.82) 3959.68,2778.68 3976.95,2761.41 cw(c3928.54,2713) 3997,2713 ccw(c4004.7,2713) 3999.25,2707.56 4013.43,2693.39 cw(c4012.04,2692) v1(4014,2692) v1@4013.19,2692
  Bottom Layer w15: v1(3147.64,2691.42) 3197.12,2691.42 3212.11,2676.42 3433.49,2676.42 v1(3439.86,2670.05)
DGND: C6.1 C11.1 C12.2 C13.2 C16.1 C17.1 C20.2 C22.1 C23.1 C24.2 CN1.2 LED1.2 R2.2 R4.1 R11.1 U1.2 U1.8 U1.9 U4.14 U4.16 U4.32 U4.33 U5.8 U5.17 | length 1060.6
  Top Layer w10: C6.1 3198.93,2679.07 3207.21,2670.8 3242.88,2670.8 3285.2,2670.8 U1.9@3298,2658 ; C24.2@3297.3,2564 3302.3,2569 C24.2 3304.8,2651.2 U1.9@3298,2658 ; U1.8@3353.12,2696.39 3322.53,2696.39 3298,2671.86 U1.9@3298,2658 ; R11.1 3563.77,2511.77 3589.6,2511.77 3592.84,2515 v1(3595,2515) ; R2.2 4013.3,2524.7 4013.3,2455.4 CN1.2 v1(4015,2454.49) ; v1(4039.12,2597.63) 4039.12,2663.81 cw(c4041.47,2663.81) R4.1
  Top Layer w20: LED1.2 3175,2739.35 ccw(c3256.71,2739.35) C6.1
  GND w20: v3(3886.65,2442.72) 3986.58,2442.72 ccw(c3986.58,2482.91) v1(4015,2454.49) ; v1(4015,2454.49) ccw(c3956.78,2512.71) 4039.12,2512.71 v1(4039.12,2597.63)
  Bottom Layer w6: U4.32@3431.56,2495.67 U4.32
  Bottom Layer w10: U4.14@3641.83,2568.54 3661.19,2587.91 3754.65,2587.91 3755.24,2587.31 3762.31,2587.31 C22.1 ; U4.16 3706.69,2500 3719.39,2500 3721.16,2501.77 3728.23,2501.77 C20.2 ; U4.16@3672.32,2542.63 U4.16@3672.32,2543.36
  other v1: 3550,2440 3565,2455 3580,2470 3595,2485 3610,2500 3475,2520 3560,2565 3545,2580 3300,2625 3320,2625
  other v3: 3940,2592 3460,2705 3564.01,2730.75 3424,2758 3424,2781 3447,2781 3630,2895 3766,2900
DRV8323_CAL: R12.1 U2.31 U4.9 | length 385.6
  Top Layer w10: U2.31@3790.64,2588.98 3800.92,2578.7 v1(3800.92,2578.19) 3800.92,2576.02 3803.23,2573.71 3803.23,2541.77 R12.1
  Sign w10: v1(3554.14,2652.55) cw(c3582.12,2652.55) 3556.53,2663.87 cw(c3582.12,2652.55) 3562.33,2672.33 3567.64,2677.64 cw(c3594.44,2650.83) 3594.44,2688.74 3648.95,2688.74 cw(c3648.95,2588.74) 3719.66,2659.45 v1(3800.92,2578.19)
  Bottom Layer w6: v1(3554.14,2652.55) U4.9
DRV8323_EN: U2.30 U4.10 | length 286.8
  Top Layer w10: v1@3699.31,2546.72 3700.84,2548.26 3700.84,2550.68 3739.25,2589.09 3739.36,2589.09 U2.30
  Sign w10: v1(3586.71,2665.14) ccw(c3601.33,2665.14) 3590.99,2654.8 v1(3699.31,2546.48)
  Bottom Layer w6: U4.10 3584.67,2625.57 3599.36,2640.26 3599.36,2652.49 v1(3586.71,2665.14)
DRV8323_HA: U2.34 U4.18 | length 315.9
  Top Layer w6: U2.34 3826.81,2636.99 3848.9,2614.91 v1(3849.46,2614.91)
  Sign w6: v1(3675.03,2460.41) 3700.72,2460.41 ccw(c3700.72,2522.44) 3744.57,2478.57 ; 3744.58,2478.58 3838.35,2572.35 ccw(c3811.5,2599.19) 3849.46,2599.19 v1(3849.46,2614.91)
  Bottom Layer w6: U4.18 3654.27,2482 3675.03,2461.24 v1(3675.03,2460.41)
DRV8323_HB: U2.36 U4.19 | length 410.9
  Top Layer w6: U2.36 3856.12,2664.83 3887.96,2633 v1(3891,2633)
  Sign w6: v1(3675,2436) 3698.32,2436 ccw(c3698.32,2492.29) 3738.12,2452.49 3887.8,2602.17 ; 3887.82,2602.18 ccw(c3874.36,2615.61) 3893.37,2615.61 3893.37,2623.49 3893.3,2623.56 3893.3,2630.7 v1(3891,2633)
  Bottom Layer w6: U4.19 3673.25,2436 v1(3675,2436)
DRV8323_HC: U2.38 U4.20 | length 476.4
  Top Layer w6: U2.38 3882.12,2692.67 3917.8,2657 v1(3918,2657)
  Sign w6: v1(3649.53,2433.51) 3658.34,2424.7 ccw(c3675.46,2441.77) 3673.92,2417.64 cw(c3673.54,2411.66) 3674.4,2417.59 ccw(c3686.91,2500.53) 3746.3,2441.3 3902.45,2597.45 ccw(c3864.89,2635) 3918,2635 v1(3918,2657)
  Bottom Layer w6: U4.20 3627.25,2454.98 3648.72,2433.51 v1(3649.53,2433.51)
DRV8323_LA: U2.35 U4.12 | length 534
  Top Layer w6: U2.35 3840.17,2650.38 3875,2615.54 v1(3875,2615)
  Sign w6: v1(3602.03,2731.44) 3633.42,2731.44 cw(c3633.47,2429.44) 3847.06,2642.94 v1(3875,2615)
  Bottom Layer w6: v1(3602.03,2731.44) 3602.03,2729.76 3645.42,2686.38 cw(c3615.75,2656.73) 3657.69,2656.73 cw(c3615.75,2656.73) 3645.42,2627.08 ; U4.12 3645.41,2627.07
DRV8323_LB: U2.37 U4.13 | length 609.4
  Top Layer w6: U2.37 3869.12,2678.76 3890.88,2657 v1(3892,2657)
  Sign w6: v1(3582.19,2748.15) 3584.06,2750.03 3665.96,2750.03 cw(c3666.13,2429.32) v1(3892,2657)
  Bottom Layer w6: v1(3582.19,2748.15) 3586.45,2752.42 cw(c3592.3,2746.57) 3592.3,2754.84 cw(c3592.3,2717.96) 3618.38,2744.04 3651.45,2710.97 cw(c3601.33,2660.88) 3672.19,2660.88 3672.19,2649.59 cw(c3632.6,2649.59) 3660.61,2621.61 3651.53,2612.53 ccw(c3657.65,2606.42) 3649,2606.42 cw(c3640.35,2606.42) 3646.47,2600.3 U4.13
DRV8323_LC: U2.39 U4.2 | length 725.8
  Top Layer w6: U2.39 3896.12,2706.59 v1(3918.72,2684)
  Sign w6: v1(3417.56,2578.38) 3417.56,2646.48 cw(c3520.78,2646.57) 3447.77,2719.53 cw(c3561.54,2605.76) 3561.58,2766.66 3719.15,2766.66 cw(c3719.16,2484.44) v1(3918.72,2684)
  Bottom Layer w6: v1(3417.56,2578.38) 3418.54,2578.38 3444.5,2552.42 U4.2
DRV8323_nF: R7.2 U2.25 U4.11 | length 160.9
  Top Layer w8: v1@3636.66,2647.51 v1(3636.66,2648.72) ; R7.2 R7.2@3646.9,2596.47
  Top Layer w10: v1@3636.66,2647.51 3636.66,2646.56 3645.13,2638.08 3646.9,2636.31 3646.9,2606.72 R7.2@3646.9,2596.47 ; v1(3636.66,2648.72) 3659.81,2648.72 U2.25
  Bottom Layer w10: U4.11@3598.92,2608.43 3598.92,2609.16 3636.66,2646.89 v1(3636.66,2648.72)
DRV8323_SOA: U2.23 U4.5 | length 249.1
  Top Layer w6: v1(3462.76,2628.87) 3486.77,2628.87 ccw(c3486.77,2669.69) 3515.61,2640.8 ; 3515.64,2640.83 3535.72,2660.92 cw(c3589.54,2607.16) 3589.54,2683.22 3622.55,2683.22 ccw(c3622.55,2715.48) 3645.35,2692.66 U2.23@3647.97,2692.67
  Top Layer w10: U2.23@3647.97,2692.67 U2.23
  Bottom Layer w6: v1(3462.76,2628.87) ccw(c3487.48,2628.87) 3465.06,2618.47 ccw(c3487.48,2628.87) 3469.99,2611.41 U4.5
DRV8323_SOB: U2.22 U4.6 | length 249.1
  Top Layer w6: v1(3463,2654) 3485.2,2654 ccw(c3485.2,2701.8) 3519,2668 cw(c3588.31,2598.69) 3588.31,2696.71 3607.57,2696.71 ccw(c3607.57,2730.46) 3631.44,2706.59 U2.22
  Bottom Layer w6: v1@3465.18,2654 v1(3463,2654) cw(c3463,2649.17) 3466.41,2652.59 3478.41,2640.59 cw(c3469.55,2631.72) 3482.08,2631.72 ccw(c3493.09,2631.72) 3485.31,2623.94 U4.6
DRV8323_SOC: U2.21 U4.7 | length 249.3
  Top Layer w6: v1(3463,2679) 3491.03,2679 ccw(c3491.03,2719.97) 3520,2691 cw(c3567.87,2643.13) 3567.87,2710.83 3594.17,2710.83 ; 3594.19,2710.83 ccw(c3594.15,2743.88) 3617.52,2720.51 U2.21
  Bottom Layer w6: v1(3463,2679) cw(c3463,2665.52) 3472.23,2675.34 3477.24,2670.34 cw(c3468.25,2661.35) 3480.96,2661.35 ccw(c3493.27,2661.35) 3484.57,2652.65 3515.07,2622.14 U4.7 ; 3472.26,2675.31 ccw(c3476.35,2679.71) 3472.87,2674.82
DVDD: C5.2 C7.2 R7.1 U2.24 U2.27 U2.29 U2.33 | length 818.3
  Top Layer w8: C7.2@3579.78,2597.27 3579.78,2613.22 cw(c3613.78,2613.22) 3589.74,2637.26 3609.85,2657.37 cw(c3634.99,2632.22) 3634.99,2667.78 3642.35,2667.78 ccw(c3642.35,2688.7) U2.24@3652.15,2670.22 ; 3665.5,2543.06 3713.4,2590.96 ; U2.27 3703.76,2635.69 3694.15,2626.08 3694.15,2610.22 3713.4,2590.96 ; U2.29 3713.4,2590.96 ; U2.24@3652.15,2670.22 ccw(c3642.35,2688.7) 3657.15,2673.91 U2.24 3660.69,2678.76 U2.24@3652.15,2670.22
  Top Layer w10: C7.2@3579.78,2597.27 C7.2 3578.02,2594.58 3611.05,2561.54 R7.1 3628.61,2543.06 3665.5,2543.06 3688.9,2519.66 ccw(c3791.37,2622.19) 3791.39,2477.24 ; 3791.43,2477.24 3865.88,2477.24 ccw(c3865.88,2501.93) 3883.34,2484.47 ccw(c3865.88,2501.93) 3890.58,2501.93 3890.58,2503.06 ccw(c3863.15,2503.06) 3882.54,2522.46 C5.2 3867.31,2537.69 3867.31,2552.89 ccw(c3830.61,2552.89) 3856.56,2578.84 U2.33
ENCODER_CLK: U4.26 U5.12 | length 832.4
  Sign w6: v1(3484.8,2393.51) ccw(c3483.52,2399.37) 3487.62,2394.99 cw(c3550.57,2328.27) 3550.57,2420 3604.99,2420 cw(c3605.18,2295.11) 3650.65,2411.43 cw(c3648.44,2405.85) 3650.89,2411.33 ccw(c3689.37,2497.21) 3753.15,2428.01 3910.11,2584.97 ccw(c3833.24,2661.91) 3942,2661.92 ; v1(3921.07,2740.08) cw(c3870.55,2689.56) 3942,2689.56 3942,2661.96
  Bottom Layer w6: v1(3484.8,2393.51) ccw(c3484.8,2419.02) 3495.19,2395.72 ccw(c3484.8,2419.02) 3502.83,2400.97 ; 3502.84,2400.98 U4.26 ; U5.12 3888.35,2753.63 cw(c3888.35,2707.36) v1(3921.07,2740.08)
ENCODER_CS: U4.25 U5.5 | length 690
  Sign w6: v1(3453.27,2391.31) 3453.27,2394.18 3481.28,2422.18 ccw(c3383.95,2519.51) 3521.59,2519.51 3521.59,2740.9 v1(3523.01,2742.32)
  Bottom Layer w6: v1(3453.27,2391.31) v1@3454.32,2388.3 ; v1@3454.34,2388.27 ccw(c3459.99,2390.29) 3455.42,2386.4 ccw(c3479.72,2407.36) 3479.82,2375.26 3481.55,2375.26 ccw(c3481.57,2431.72) 3521.58,2391.89 U4.25 ; v1(3523.01,2742.32) 3524.64,2742.32 3540.21,2757.89 cw(c3716.66,2581.44) 3712.07,2830.94 3713.77,2832.64 3714.68,2833.55 3715.53,2834.4 3715.99,2835.51 U5.5
ENCODER_MISO: U4.27 U5.7 | length 806.4
  Sign w6: 3397.86,2579.92 ccw(c3435.9,2579.9) 3408.92,2553.08 cw(c3392.1,2536.1) 3416,2536.09 ; 3397.86,2579.95 3397.86,2646.1 cw(c3514.29,2646.15) 3431.9,2728.42 3461.61,2758.13 cw(c3503.2,2716.54) 3481.9,2771.37 cw(c3503.2,2716.54) v1(3503.2,2775.36) 3503.04,2774.95 3502.58,2773.85 3501.74,2773.01 v1@3500.09,2771.37 ; 3416,2536.05 3416,2434.99 ccw(c3452.38,2434.99) v1(3426.66,2409.27)
  Bottom Layer w6: v1@3426.96,2409.58 3458.74,2409.58 ccw(c3458.74,2469.56) U4.27 ; v1(3503.2,2775.36) ccw(c3503.2,2847.99) 3545.05,2788.63 cw(c3667.34,2619.87) 3561.04,2799.13 cw(c3684.5,2590.97) 3580.35,2809.43 cw(c3832.37,2280.81) 3672.82,2844.28 ccw(c3671.14,2850.04) 3673.75,2844.63 ; 3673.79,2844.65 ccw(c3649.6,2893.89) 3693.05,2860.4 cw(c3717.01,2835.29) 3717.01,2870 3737.93,2870 cw(c3737.93,2852.93) 3750,2865 cw(c3732.36,2847.36) 3757.31,2847.36 U5.7
ENCODER_MOSI: U4.28 U5.4 | length 566.6
  Sign w6: v1@3453.31,2427.98 ccw(c3357.11,2536.57) 3502.19,2536.57 v1(3502.19,2724.81)
  Bottom Layer w6: v1(3453.43,2427.84) 3455.33,2427.84 ccw(c3455.33,2472.97) U4.28 ; v1(3502.19,2724.81) ccw(c3513.6,2736.22) 3513.47,2720.08 cw(c3513.42,2714.08) 3513.72,2720.07 ccw(c3515.35,2748.94) 3535.81,2728.49 3566.33,2759.02 cw(c3686.08,2639.3) 3616.29,2793.58 cw(c3701.02,2606.26) 3686.69,2811.35 ccw(c3686.23,2817.33) U5.4@3688.85,2811.94 ; U5.4@3688.89,2811.96 U5.4
FDCAN_RX: U1.4 U4.21 | length 728.9
  Top Layer w10: v1(3228.14,2603.36) 3229.67,2604.89 3229.67,2612.31 3236.07,2618.71 3241.98,2618.71 U1.4@3242.88,2619.61
  Sign w10: v1(3228.14,2603.36) 3250,2581.5 3250,2464.42 ccw(c3350,2464.42) 3279.29,2393.71 3281.97,2391.03 ; 3281.99,2391.01 ccw(c3373.7,2482.64) 3373.72,2353 ; 3373.76,2353 3585.52,2353 ccw(c3585.52,2453) 3656.23,2382.29 v1(3660.55,2386.6)
  Bottom Layer w8: U4.21 3658.63,2394.94 3658.63,2388.52 v1(3660.55,2386.6)
FDCAN_TX: U1.1 U4.22 | length 751.1
  Top Layer w10: v1(3231.01,2711.91) 3231.01,2709.74 3236.07,2704.68 3236.07,2697.29 3236.98,2696.39 U1.1@3242.88,2696.39
  Sign w10: v1(3231.01,2711.91) 3267,2675.92 3267,2617.54 3267,2471.24 ccw(c3368.66,2472.67) 3368.68,2371 ; 3368.73,2371 3571.77,2371 ccw(c3571.77,2453.89) v1(3630.39,2395.28)
  Bottom Layer w8: U4.22@3598.73,2427.14 3598.73,2426.94 v1(3630.39,2395.28)
  Bottom Layer w10: U4.22 U4.22@3598.73,2427.14
NetC3_1: C3.1 U2.3 | length 97.8
  Top Layer w10: U2.3 3904.59,2810 3935,2810 C3.1
NetC4_1: C4.1 U2.1 | length 119.6
  Top Layer w10: U2.1 3920.29,2770 C4.1
NetC4_2: C4.2 U2.2 | length 108
  Top Layer w10: U2.2 3912.44,2790 3969.15,2790 3983.54,2804.39 3990.61,2804.39 C4.2
NetC10_1: C10.1 U6.4 | length 94.6
  Top Layer w10: U6.4 4217.09,2784.09 4217.09,2755.86 4222.94,2750 4250,2750 4262.5,2762.5 4265,2762.5 4270,2767.5 C10.1
NetC10_2: C10.2 L1.1 U6.6
NetC11_2: C11.2 R13.2 U4.4 | length 140.3
  Top Layer w10: v1(3445.4,2610.44) 3446.93,2608.91 3461.09,2608.91 R13.2 ; C11.2@3450.92,2542.08 C11.2@3451.33,2542.08 ; C11.2 3482.58,2573 ; R13.2@3485.92,2574.08 R13.2@3485.92,2575.28
  Bottom Layer w10: v1(3445.4,2610.44) 3445.4,2608.89 3473.32,2580.98 U4.4
NetC21_2: C21.2 U6.2 | length 78
  Top Layer w10: U6.2 4165,2732.43 4181.18,2716.25 C21.2
NetC22_2: C22.2 L2.2 U4.15 | length 158.1
  Bottom Layer w10: U4.15 3671.84,2570 3706.2,2570 C22.2@3722.07,2554.14
  Bottom Layer w20: C22.2 3730.4,2555.4 3761.85,2523.95 3771.7,2523.95 L2.2@3786.95,2539.19
NetD1_G: D1.G U2.6 | length 294.5
  Top Layer w8: U2.6@3840.45,2829.37 3901.29,2890.21 3901.29,2914.02 v1(3900.1,2915.21)
  Sign w10: v1(3900.1,2915.21) 3900.1,2998.68 cw(c4000.1,2998.68) 3929.39,3069.39 v1(3934,3074)
  Bottom Layer w10: D1.G 3921,3074 v1(3934,3074)
NetD2_G: D2.G U2.8 | length 383.5
  Top Layer w8: U2.8 3812.65,2856.92 3836.3,2880.57 v1(3836.63,2880.57)
  Sign w10: v1(3836.63,2880.57) ccw(c3850.09,2894.03) 3850.09,2875 3873.79,2875 ccw(c3873.79,2926.21) 3909.99,2889.99 3916.72,2896.72 ccw(c3806.67,3006.76) 3962.3,3006.78 3962.3,3085.92 cw(c4009.08,3085.92) v1(3976,3119)
  Bottom Layer w10: D2.G 3955.26,3117.8 3974.8,3117.8 v1(3976,3119)
NetD2_S: D2.S R8.2 U2.9 | length 263.4
  Top Layer w10: U2.9 3944.08,3016.52 ; 3944.09,3016.53 cw(c3954.86,3005.75) 3954.86,3020.98 3961.17,3020.98 3985.4,3045.22 R8.2
  other v1: 3995,3075 3995,3095 3995,3135 3975,3155 3995,3155 3975,3175 3995,3175 3975,3195 3995,3195
NetD3_G: D3.G U2.15 | length 270.1
  Top Layer w8: v1(3659.58,2860.81) 3659.58,2860.07 3688.83,2830.82 U2.15@3688.83,2830.12
  Sign w10: v1(3659.58,2860.81) ccw(c3659.58,2883.2) 3674.89,2866.86 cw(c3681.73,2859.57) 3675.13,2867.09 ccw(c3559.99,2997.6) 3734.03,2997.74 ; 3734.03,2997.78 v1(3734.03,3060.17)
NetD4_G: D4.G U2.13 | length 391.6
  Top Layer w8: v1(3660,2917) 3660,2915.8 3717.67,2858.12 U2.13
  Sign w10: v1(3625.71,3193.5) cw(c3573.46,3124.51) 3660,3124.49 ; v1(3660,2917) 3660,3124.44
  Bottom Layer w10: v1(3625.71,3193.5) 3625.76,3193.44 D4.G D4.G
NetD4_S: D4.S R9.2 U2.12 | length 206.2
  Top Layer w10: R9.2 3655,3045.22 3688.11,3012.11 ; 3688.14,3012.08 cw(c3640.09,2964.09) 3708,2964.09 3708,2911.23 ccw(c3748.28,2911.23) 3719.8,2882.75 3731.59,2870.96 U2.12
  other v1: 3630,3070 3620,3115 3620,3140 3620,3165
NetD5_G: D5.G U2.16 | length 319.7
  Top Layer w8: v1(3585,2915) 3595.27,2904.73 ; 3595.28,2904.72 cw(c3587.24,2896.7) 3598.59,2896.7 ccw(c3609.95,2896.7) 3601.91,2888.68 ; 3601.92,2888.67 U2.16@3675.43,2815.17
  Sign w10: v1(3520.59,3075) 3520.59,3011.79 ccw(c3598.76,3011.79) 3543.49,2956.51 v1(3585,2915)
NetD6_G: D6.G U2.18 | length 419.2
  Top Layer w8: v1(3554.44,2887.04) 3556.36,2885.13 3556.36,2879.05 U2.18
  Sign w8: v1(3554.44,2887.04) 3580.79,2887.04 ccw(c3580.79,2912.1) 3598.47,2894.34 ccw(c3582.84,2910.05) 3605,2910.05 3605,3076.88
  Sign w10: v1(3577.09,3117.04) 3596.34,3097.79 cw(c3575.42,3076.88) 3605,3076.88
NetD6_S: D6.S R10.2 U2.19 | length 339.6
  Top Layer w10: 3534.36,3004.58 ccw(c3566.72,2972.28) 3521,2972.28 3521,2927.98 ccw(c3621,2927.98) 3550.29,2857.27 U2.19 ; 3534.39,3004.61 3575,3045.22 R10.2
  other v1: 3555,3070 3580,3070 3590,3150 3590,3175 3590,3200
NetLED1_1: LED1.1 R5.2 | length 79.3
  Top Layer w20: LED1.1 cw(c3317.17,2715.33) 3317.17,2800 R5.2
NetR11_2: R11.2 U4.31 | length 146.2
  Top Layer w10: v1(3434.92,2445.22) cw(c3444.03,2436.11) 3444.03,2449 3462.93,2449 ccw(c3462.93,2540.9) R11.2
  Bottom Layer w10: v1(3434.92,2445.22) cw(c3448.22,2458.52) 3430.75,2451.56 cw(c3448.22,2458.52) 3429.41,2458.52 3429.41,2459.46 cw(c3447.01,2459.46) 3431.95,2468.57 cw(c3447.01,2459.46) 3434.57,2471.91 U4.31
NetR14_2: R14.2 U6.3 | length 87.3
  Top Layer w10: U6.3 4191.5,2784.09 4191.5,2748.5 4218.75,2721.25 4221.18,2721.25 4226.18,2716.25 R14.2
NetR15_1: R15.1 R17.1 U4.8 | length 1084.9
  Top Layer w10: R17.1 v1(4150,2595) R15.1
  Sign w10: v1(3492.81,2856.12) cw(c3511.31,2837.62) 3511.31,2863.78 3511.72,2863.78 cw(c3511.72,2816.72) 3545,2850 ccw(c3581.21,2886.21) 3581.21,2835 3608.62,2835 ; 3608.67,2835 3923.58,2835 cw(c3923.58,2735) 3994.29,2805.71 4120.71,2679.29 cw(c4050,2608.58) 4150,2608.58 v1(4150,2595)
  Bottom Layer w10: v1(3492.81,2856.12) ccw(c3521.32,2827.6) 3481,2827.6 3481,2715.3 ccw(c3556.4,2715.27) 3503.1,2661.93 3508.51,2656.52 3508.61,2656.31 3509.32,2655.6 U4.8
NetR16_1: R16.1 R18.2 R19.2 | length 129.7
  Top Layer w10: R19.2 R16.1 4086.18,2711.25 4124.38,2673.05 4131.18,2673.05 4136.18,2668.05 R18.2
NetR18_1: R18.1 U6.1 | length 72.6
  Top Layer w10: R18.1 4138.5,2716.07 4138.5,2784.09 U6.1
PGND: C1.1 C2.1 C8.1 C9.1 C14.1 C15.1 C18.1 C19.1 C21.1 C25.1 C26.1 H1.3 H1.4 H2.3 H2.4 R3.2 R4.2 R8.1 R9.1 R10.1 R17.2 R19.1 U2.10 U2.11 U2.20 U2.40 U2.41 U3.2 U6.5 | length 1516.5
  Top Layer w10: R10.1 3449.6,3045.22 3487.41,3007.41 cw(c3449.77,2969.77) 3503,2969.77 3503,2918.15 ccw(c3603,2918.15) 3532.29,2847.44 U2.20 ; U2.11 3745.51,2884.87 3735.76,2894.63 cw(c3759.31,2918.18) 3726,2918.18 3726,2965.94 cw(c3786.06,2965.94) 3743.59,3008.41 3780.4,3045.22 R9.1 ; U2.41 3890.16,2740 3909.65,2720.51 U2.40 3916.93,2713.34 ccw(c3925,2721.42) 3925,2710 3971.08,2710 ccw(c3971.08,2723.36) R3.2 3980.53,2715.02 3985.53,2720.02 4034.81,2720.02 R4.2@4039.81,2715.02 ; U2.10 3784.49,2884.87 3889.63,2990.01 ccw(c3876.55,3003.09) 3895.04,3003.09 3895.04,3003.52 ccw(c3877.58,3003.52) 3889.94,3015.85 3884.81,3020.98 3884.23,3020.98 3860,3045.22 R8.1 ; v1(4030,2815) 4075.14,2815 ; R17.2 cw(c4103.69,2623.69) 4063.12,2623.69 4063.12,2679.88 ccw(c4037.8,2679.88) 4055.7,2697.78 R4.2 ccw(c4010.81,2743.08) 4052.11,2743.03 cw(c4187.94,2743.08) 4064.39,2799.54 cw(c4112.55,2777.53) 4075.14,2815 ; R19.1 cw(c4077.13,2827.81) 4077.13,2815 4075.14,2815 ; v1(4160,2685) cw(c4160,2680.82) 4162.96,2683.78 C21.1 ; v1(4275,2555) C9.1 ; v1(4302.53,2770) C8.1
  Top Layer w20: v1(3125,3010) 3125,3008.4 C1.1 ; U3.2 C8.1
  GND w20: v1(3120,2748) v1@3120.37,2748.37
  Bottom Layer w10: v1@4298.32,2771.75 ccw(c4302.53,2775.96) v1(4302.53,2770)
  other v1: 4080,2625 3120,2770 3120,2791 3120.37,2811.1 4052.57,2815 4110,2815 3125,2990 3145,2990 3165,2990 3185,2990 3205,2990 3225,2990 3245,2990 3145,3010 3165,3010 3185,3010 3205,3010 3225,3010 3245,3010 3800,3075 3800,3095 3800,3115 3800,3135 3800,3155 3800,3175 3800,3195
  other v2: 4254.45,2974.3 4254.45,2999.3 4254.45,3024.3 4254.45,3049.3
SHA: D1.S D2.D pad.9@3880,3160 U2.7 | length 286.3
  Top Layer w8: U2.7 3827.55,2843.01 3836.77,2852.23 3837.22,2852.23 3871.81,2886.82 3871.81,2890.36 3876.3,2894.85 v1(3876.3,2897.56)
  Sign w10: v1(3876.3,2897.56) 3876.3,3048.5 cw(c3948.5,3048.5) v1(3897.45,3099.55) 3896.86,3099.12 ccw(c3902.74,3091.04) 3896.79,3099.07 3896.21,3098.64 v1@3895.67,3098.11
  other v1: 3850,3130 3870,3130 3890,3130 3910,3130 3850,3150 3870,3150 3890,3150 3910,3150 3850,3170 3870,3170 3890,3170 3910,3170 3850,3190 3870,3190 3890,3190 3910,3190
SHB: D3.S D4.D pad.9@3725,3160 U2.14 | length 287.2
  Top Layer w8: v1@3660.37,2887.63 3703.76,2844.24 U2.14
  Sign w10: v1(3659.76,2887.63) 3678.88,2906.75 ; 3678.91,2906.78 ccw(c3632.72,2952.91) 3698,2952.91 3698,3098.66 v1(3697.65,3099.01)
  other v1: 3690,3130 3710,3130 3730,3130 3750,3130 3690,3150 3710,3150 3730,3150 3750,3150 3690,3170 3710,3170 3730,3170 3750,3170 3690,3190 3710,3190 3730,3190 3750,3190
SHC: D5.S D6.D pad.9@3485,3160 U2.17 | length 363.2
  Top Layer w8: v1(3555,2915) 3572.46,2897.54 cw(c3568.05,2893.14) 3574.28,2893.14 ccw(c3584.38,2893.14) 3577.24,2886 U2.17
  Sign w10: 3493,3007.54 ccw(c3566.89,3007.61) 3514.64,2955.36 v1(3555,2915) ; 3493,3007.61 v1(3493,3095.59)
  Bottom Layer w10: v1(3493,3095.59) cw(c3496.41,3095.59) v1@3494,3098
  other v1: 3455,3130 3475,3130 3495,3130 3515,3130 3455,3150 3475,3150 3495,3150 3515,3150 3455,3170 3475,3170 3495,3170 3515,3170 3455,3190 3475,3190 3495,3190 3515,3190
STATE_LED: R5.1 U4.3 | length 280.7
  Top Layer w10: R5.1 3341.51,2751.8 cw(c3341.51,2711.51) 3349.98,2750.9 cw(c3341.51,2711.51) 3361.14,2746.7 cw(c3341.51,2711.51) v1(3370,2740)
  Sign w10: v1(3370,2740) 3370,2737.84 3378.95,2728.88 v1(3378.95,2601.09)
  Bottom Layer w10: v1(3378.95,2601.09) v1(3378.95,2601.09) 3424.59,2601.14 U4.3
SWCLK: CN1.3 R2.1 U4.24 | length 563.8
  Top Layer w10: v1(3961,2375) 3961,2377.16 3965.39,2381.55 CN1.3 3964.59,2454.89 3964.59,2525.21 R2.1
  Bottom Layer w6: U4.24 3586.77,2383.29 ccw(c3657.48,2454) 3657.48,2354 3910.3,2354 ccw(c3910.3,2425.7) v1(3961,2375)
SWDIO: CN1.4 R1.1 U4.23 | length 537.5
  Top Layer w10: v1(3912,2376) 3912,2378.16 3916.18,2382.34 CN1.4 3915.49,2454.79 3915.49,2564.31 R1.1
  Bottom Layer w6: U4.23 3613.97,2383.92 ccw(c3653.72,2423.68) 3653.72,2367.46 3891.38,2367.46 ccw(c3891.38,2396.62) 3907.06,2372.03 ccw(c3891.38,2396.62) v1(3912,2376)
VBUS: C1.2 C2.2 C3.2 C14.2 C15.2 C25.2 C26.2 D1.D D3.D D5.D H1.1 H1.2 H2.1 H2.2 R14.1 R15.2 U2.4 U2.5 U6.7 | length 412.5
  Top Layer w10: R14.1 4226.29,2665.44 v3(4226.29,2630.28) 4226.29,2595.11 R15.2
  Sign w10: v2(4090,2920) 4197,2813 cw(c4126.29,2742.29) 4226.29,2742.29 v3(4226.29,2630.28)
  other v2: 3210,2905 3235,2905 3260,2905 3285,2905 3310,2905 3335,2905 3360,2905 3385,2905 4065,2920 3210,2930 3235,2930 3260,2930 3285,2930 3310,2930 3335,2930 3360,2930 3385,2930 4065,2945 4090,2945 4065,2970 4090,2970 4065,2995 4090,2995
pads on no net: CN1.5 CN1.6 H1.7 H1.8 H2.7 H2.8 U2.28 U3.4 U4.29 U4.30 U5.1 U5.2 U5.3 U5.6 U5.9 U5.10 U5.11 U5.15 U5.16 U6.8

## Polygon pours and split planes (outlines as drawn)
PGND on Top Layer "NONET_L-01_P-001" (solid, pour order 28): 3870,2755 4030,2755 4040,2765 4040,2785 4015,2810 4015,2895 4120,2895 4120,2810 4100,2790 4075,2790 4070,2785 4070,2655 4090,2635 4090,2575 4050,2575 4050,2685 4040,2695 3925,2695 3890,2730 3870,2730
VBUS on Top Layer "Top Layer-VBUS" (hatched Horizontal grid 4 track 5, remove dead copper, pour order 5): 4155,2845 4175,2845 4175,2915 4180,2920 4180,3020 4052,3020 4002,2970 3838.5,2806.5 3860,2785 3920,2845 3980,2905 4115,2905 4125,2915 4155,2915
5V on Top Layer "5V_L01_P003" (hatched Horizontal grid 4 track 5, remove dead copper, pour order 3): 4325,3075 4325,2960 4305,2940 4305,2800 4340,2800 4340,2680 4300,2680 4300,2735 4260,2735 4260,2645 4385,2645 4385,3015 4377.34,3040.33 4365,3060 4350,3075
NetC10_2 on Top Layer "NETC10_2_L01_P002" (hatched Horizontal grid 4 track 5, remove dead copper, pour order 2): 4180,2905 4180,2825 4230,2825 4255,2800 4295,2800 4295,2945 4245,2945 4240,2940 4240,2840 4205,2840 4205,2905
PGND on Top Layer "PGND_L01_P001" (hatched Horizontal grid 4 track 5, remove dead copper, pour order 1): 4210,2850 4210,2905 4190,2925 4190,3020 4245,3075 4315,3075 4315,2965 4305,2955 4240,2955 4230,2945 4230,2850
NetD2_S on Top Layer "NETD2_S_L01_P019" (hatched Horizontal grid 4 track 5, remove dead copper, pour order 19): 4015,3015 4015,3215 3935,3215 3935,3105 3955,3085 3955,3015
VBUS on Top Layer "VBUS_L01_P008" (hatched Horizontal grid 4 track 5, remove dead copper, pour order 8): 3111,2950 3423,2950 3423,2832 3111,2832
PGND on Top Layer "PGND_L01_P007" (hatched Horizontal grid 4 track 5, remove dead copper, pour order 7): 3111,3028 3377,3028 3420,3071 3420,3083 3479,3083 3479,3014 3424,2959 3111,2959
PGND on Top Layer "Top Layer-PGND" (solid, pour order 26): 3752,3012 3888,3012 3888,3087 3865,3110 3840,3110 3830,3120 3830,3215 3775,3215 3775,3107 3752,3084
NetD6_S on Top Layer "NETD6_S_L01_P017" (hatched Horizontal grid 4 track 5, remove dead copper, pour order 17): 3545,3215 3545,3015 3600,3015 3600,3215
NetD4_S on Top Layer "NETD4_S_L01_P018" (hatched Horizontal grid 4 track 5, remove dead copper, pour order 18): 3610,3215 3610,3015 3670,3015 3670,3215
DGND on Bottom Layer "DGND_L04_P021" (hatched Horizontal grid 4 track 5, remove dead copper, pour order 21): 3295,2825 3295,2585 3115,2585 3115,2555 3230,2365 3240,2355 3950,2355 3950,2910 3520,2910 3435,2825
NetD2_S on Bottom Layer "NETD2_S_L04_P020" (hatched Horizontal grid 4 track 5, remove dead copper, pour order 20): 3940,3210 3940,3135 3990,3135 3990,3090 3955,3090 3955,3055 4040,3055 4040,3210
NetD4_S on Bottom Layer "NETD4_S_L04_P016" (hatched Horizontal grid 4 track 5, remove dead copper, pour order 16): 3610,3175 3665,3175 3665,3055 3610,3055
NetD6_S on Bottom Layer "NETD6_S_L04_P015" (hatched Horizontal grid 4 track 5, remove dead copper, pour order 15): 3540,3210 3540,3055 3600,3055 3600,3210
SHA on Bottom Layer "SHA_L04_P012" (hatched Horizontal grid 4 track 5, remove dead copper, pour order 12): 3820,3210 3820,3055 3905,3055 3905,3100 3930,3100 3930,3210
SHB on Bottom Layer "SHB_L04_P011" (hatched Horizontal grid 4 track 5, remove dead copper, pour order 11): 3675,3210 3675,3100 3650,3100 3650,3055 3720,3055 3720,3100 3780,3100 3780,3210
SHC on Bottom Layer "SHC_L04_P010" (hatched Horizontal grid 4 track 5, remove dead copper, pour order 10): 3420,3055 3420,3210 3530,3210 3530,3100 3505,3100 3505,3055
VBUS on Bottom Layer "VBUS_L04_P009" (hatched Horizontal grid 4 track 5, remove dead copper, pour order 9): 3105,2845 3105,2950 3350,2950 3440,3040 4090,3040 4105,3025 4105,2845 3952,2845 3952,2935 3520,2935 3430,2845
PGND on Bottom Layer "NONET_L-01_P-001" (solid, pour order 27): 3960,2835 3960,2730 4060,2730 4060,2590 4385,2590 4385,3005 4350,3040 4225,3040 4225,2975 4125,2975 4125,2835
PGND on Bottom Layer "PGND_L04_P022" (hatched Horizontal grid 4 track 5, remove dead copper, pour order 22): 3105,2830 3105,2725 3460,2725 3460,2830
PGND on GND "NONET_L-01_P-001" (solid, pour order 24): 3110,2725 3285,2725 3285,2835 3430,2835 3520,2925 3961,2925 3961,2525 4360,2525 4380,2545 4380,3010 4361.32,3069.37 4330,3130 4280.76,3198.13 4245,3215 3245,3215 3213.67,3198.13 3175,3145 3144.33,3091.34 3110,3010
DGND on GND "GND-DGND" (solid, pour order 30): 3122,2552 3139.27,2493.31 3168.47,2440.99 3210.79,2379.5 3230.89,2359.4 3247,2352 4227,2352 4253.03,2356.16 4283.24,2372 4305.35,2397.63 4324.36,2430.23 4340,2465 4340,2510 3947,2510 3947,2907 3527,2907 3442,2822 3302,2822 3302,2615 3122,2615

## Other copper
Top Layer:
  pour cut-out: 3788,2902 3767,2879 3792,2853 3815,2876
  pour cut-out: 3739,2906 3711,2876 3739,2850 3767,2879
  pour cut-out: 3625,2796 3597,2768 3627,2739 3654,2767
Bottom Layer:
  pour cut-out: 3660.1,2603.35 3618,2559.5 3646,2532.5 3689.87,2574.61

## Silkscreen, mask and mechanical layers (free items; w line width, h text height)
Mechanical 1:
  circle w10: c3343.92,3098.12 r39.37
  circle w10: c3343.92,2468.2 r39.37
  circle w10: c4151.01,2468.2 r39.37
  circle w10: c4151.01,3098.12 r39.37
  lines w10: 3100.25,2561.3 ccw(c3178.99,2561.3) 3105.64,2532.67 ccw(c3747.47,2783.16) 3194.62,2372 ccw(c3257.81,2418.99) 3257.81,2340.25 4237.13,2340.25 ccw(c4237.13,2418.99) 4300.31,2372 ccw(c3747.47,2783.16) 4389.29,2532.67 ccw(c4315.94,2561.3) 4394.68,2561.3 4394.68,3005.03 ccw(c4315.94,3005.03) 4389.29,3033.66 ccw(c3747.47,2783.16) 4300.31,3194.33 ccw(c4237.13,3147.34) 4237.13,3226.08 3257.81,3226.08 ccw(c3257.81,3147.34) 3194.62,3194.33 ccw(c3747.47,2783.16) 3105.64,3033.66 ccw(c3178.99,3005.03) 3100.25,3005.03 3100.25,2561.3